# EAGLE board main_board (EAGLE 5.12)
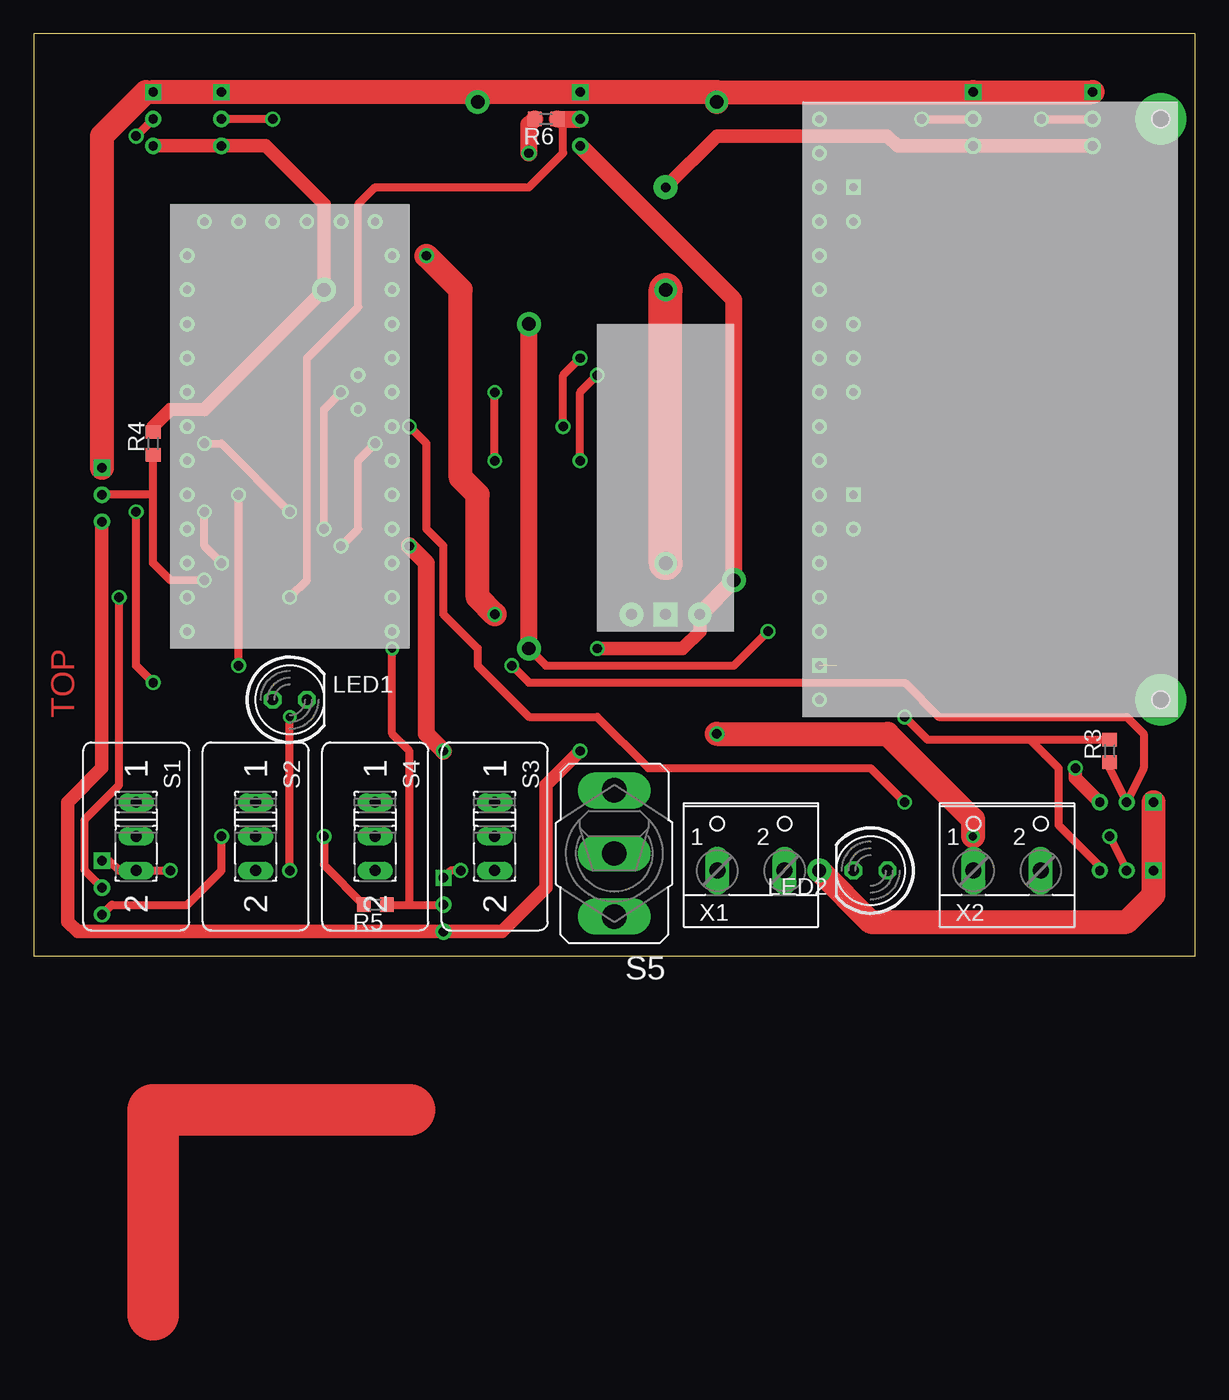
[diagram p0: board, top side]
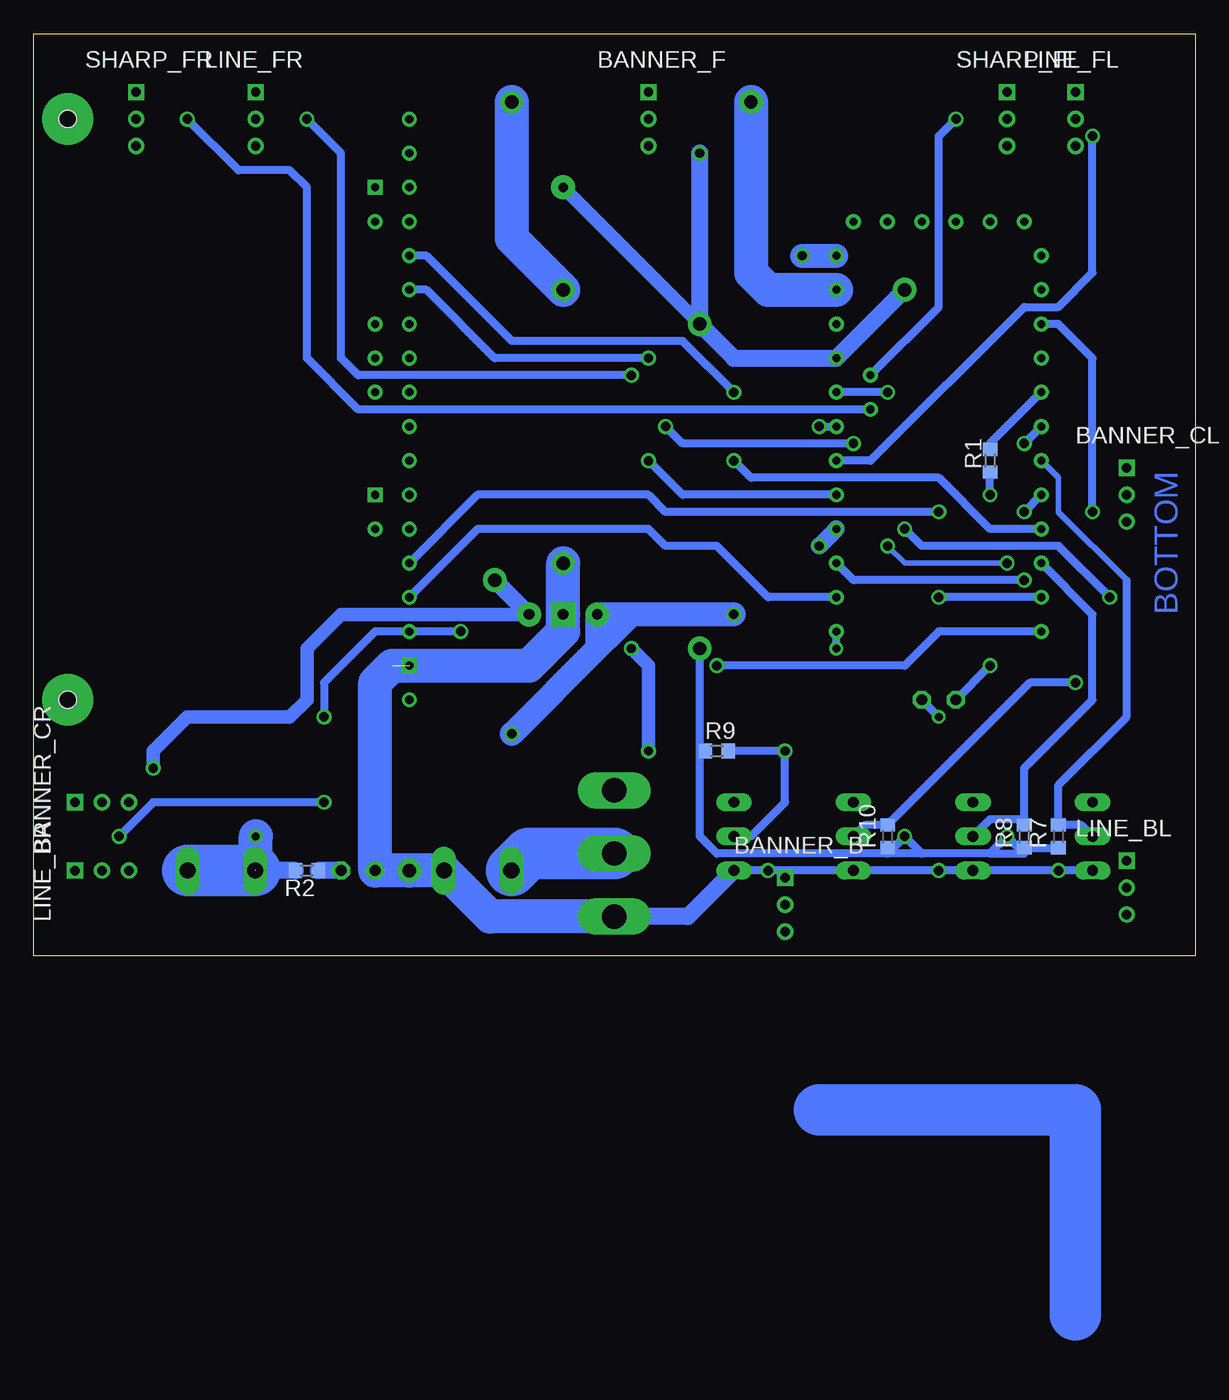
[diagram p1: board, bottom side, seen from below]

Size 86.36 x 68.58 mm. Coordinates in mm from the lower left corner, seen from the top.
Outline: 0,0 86.36,0 86.36,68.58 0,68.58 0,0
Copper layers (1*16): Top 0.035mm / dielectric 1.5mm / Bottom 0.035mm
Design rules "default *": minimum track width 10mil, minimum drill 20mil, track to track 8mil, track to pad 8mil, pad to pad 8mil, via to via 8mil, smd to smd 8mil, copper to edge 40mil, drill to drill 8mil, minimum pad ring 10mil, minimum via ring 8mil, stop-mask expansion 4mil, vias tented up to drill 0mil, thermal gap 10mil

## Footprints (pad centres in the part's own frame; a part is rotated, then mirrored left to right if it is on the bottom)
CON_JST = drill 0.7 square: 1 0,2 | drill 0.7 round: 2 0,0; 3 0,-2
LED5MM = drill 0.813 octagon: A -1.27,0; K 1.27,0
R0603 = smd 1 x 1.1: 1 -0.85,0; 2 0.85,0
M251 = drill 0.813 long: 1 -2.54,0; 2 0,0; 3 2.54,0
M9040P = drill 1.803 long: 1 0,4.699; 2 0,0; 3 0,-4.699
BOOST_ADJ = drill 0.8 pad 1.778 square: GND 5.08,1.27 | drill 0.8 pad 1.778 round: VIN 2.54,1.27; VOUT 7.62,1.27
DRIVER_DUAL_MC33926 = drill 0.6 round: /M1D2 1.27,13.97; /M1SF 1.27,19.05; /M2D2 1.27,36.83; /M2SF 1.27,41.91; EN 1.27,24.13; INV 1.27,29.21; M1D1 1.27,16.51; M1FB 1.27,21.59; M1IN1 1.27,11.43; M1IN2 1.27,8.89; M2D1 1.27,39.37; M2FB 1.27,44.45; M2IN1 1.27,34.29; M2IN2 1.27,31.75; P$20 3.81,36.83; P$21 3.81,29.21; P$22 3.81,26.67; P$23 3.81,24.13; P$25 3.81,13.97; SLEW 1.27,26.67; VDD 1.27,6.35; VIN 1.27,1.27 | drill 0.6 square: GND 1.27,3.81; P$2 3.81,39.37; P$3 3.81,16.51 | hole 1.3: 26.67,44.45; 26.67,1.27
ARDUINO_PRO_MINI = drill 0.6 round: DTR -5.08,5.08; GND -6.35,-5.08; GND' 5.08,5.08; GND'' 7.62,5.08; GND''' 8.89,0; PB0 -6.35,-22.86; PB1 -6.35,-25.4; PB2 8.89,-25.4; PB3 8.89,-22.86; PB4 8.89,-20.32; PB5 8.89,-17.78; PC0 8.89,-15.24; PC1 8.89,-12.7; PC2 8.89,-10.16; PC3 8.89,-7.62; PC4 6.35,-8.89; PC5 6.35,-6.35; PC6 -6.35,-2.54; PD0 -6.35,0; PD0' 0,5.08; PD1 -6.35,2.54; PD1' -2.54,5.08; PD2 -6.35,-7.62; PD3 -6.35,-10.16; PD4 -6.35,-12.7; PD5 -6.35,-15.24; PD6 -6.35,-17.78; PD7 -6.35,-20.32; RAW 8.89,2.54; RESET 8.89,-2.54; VCC 8.89,-5.08; VCC' 2.54,5.08
W237-102 = drill 1.194 long: 1 -2.5,-1.27; 2 2.5,-1.27

## Placement (x,y rotation side)
BANNER_B  CON_JST  [CON_JST]  30.48,3.81 0 bottom
BANNER_CL  CON_JST  [CON_JST]  5.08,34.29 0 bottom
BANNER_CR  CON_JST  [CON_JST]  81.28,11.43 90 bottom
BANNER_F  CON_JST  [CON_JST]  40.64,62.23 0 bottom
LED1  [LED5MM]  19.05,19.05 0 top
LED2  [LED5MM]  62.23,6.35 180 top
LINE_BL  CON_JST  [CON_JST]  5.08,5.08 0 bottom
LINE_BR  CON_JST  [CON_JST]  81.28,6.35 90 bottom
LINE_FL  CON_JST  [CON_JST]  8.89,62.23 0 bottom
LINE_FR  CON_JST  [CON_JST]  69.85,62.23 0 bottom
R1  1k  [R0603]  15.24,36.83 90 bottom
R2  1k  [R0603]  66.04,6.35 180 bottom
R3  10k  [R0603]  80.01,15.24 90 top
R4  10k  [R0603]  8.89,38.1 90 top
R5  10k  [R0603]  25.4,3.81 180 top
R6  10k  [R0603]  38.1,62.23 180 top
R7  10k  [R0603]  10.16,8.89 90 bottom
R8  10k  [R0603]  12.7,8.89 90 bottom
R9  10k  [R0603]  35.56,15.24 0 bottom
R10  10k  [R0603]  22.86,8.89 90 bottom
S1  [M251]  7.62,8.89 270 top
S2  [M251]  16.51,8.89 270 top
S3  [M251]  34.29,8.89 270 top
S4  [M251]  25.4,8.89 270 top
S5  [M9040P]  43.18,7.62 180 top
SHARP_FL  CON_JST  [CON_JST]  13.97,62.23 0 bottom
SHARP_FR  CON_JST  [CON_JST]  78.74,62.23 0 bottom
U$1  BOOST_ADJ  [BOOST_ADJ]  41.91,24.13 0 top
U$2  DRIVER_DUAL_MC33926  [DRIVER_DUAL_MC33926]  57.15,17.78 0 top
U$3  ARDUINO_PRO_MINI  [ARDUINO_PRO_MINI]  17.78,49.53 0 top
X1  [W237-102]  53.34,7.62 0 top
X2  [W237-102]  72.39,7.62 0 top

## Library data of the parts
BANNER_B BANNER_CL BANNER_CR BANNER_F LINE_BL LINE_BR LINE_FL LINE_FR SHARP_FL SHARP_FR U$1-U$3 = alte_piese
LED1 LED2 = led
R1-R6 = rcl
R7-R10 = resistor
S1-S5 = switch
X1 X2 = con-wago-500; MPN: 237-102; OC_FARNELL: unknown; OC_NEWARK: 70K9898

## Nets
+5V: LINE_BL.3 LINE_BR.3 LINE_FL.3 LINE_FR.3 R3.2 R4.2 R5.2 R6.2 R7.1 R8.1 R9.1 R10.1 SHARP_FL.3 SHARP_FR.3 U$2.VDD U$3.VCC
+8V: R2.2 U$1.VIN U$3.RAW X2.1 X2.2
+12V: BANNER_B.3 BANNER_CL.3 BANNER_CR.3 BANNER_F.3 U$1.VOUT
N$1: S5.2 X1.1
N$2: LED1.A R1.1
N$4: LED2.A R2.1
N$16: BANNER_B.1 BANNER_CL.1 BANNER_CR.1 BANNER_F.1 LED1.K LED2.K LINE_BL.1 LINE_BR.1 LINE_FL.1 LINE_FR.1 S1.3 S2.3 S3.3 S4.3 S5.1 SHARP_FL.1 SHARP_FR.1 U$1.GND U$2.GND U$3.GND''' X1.2
PB0: BANNER_F.2 R6.1 U$3.PB0
PB1: BANNER_CR.2 R3.1 U$3.PB1
PB2: BANNER_B.2 R5.1 U$3.PB2
PB3: U$2.M1IN2 U$3.PB3
PB4: BANNER_CL.2 R4.1 U$3.PB4
PB5: R9.2 S3.2 U$3.PB5
PC0: LINE_FR.2 U$3.PC0
PC1: LINE_FL.2 U$3.PC1
PC2: LINE_BR.2 U$3.PC2
PC3: LINE_BL.2 U$3.PC3
PC4: SHARP_FR.2 U$3.PC4
PC5: SHARP_FL.2 U$3.PC5
PC6: R10.2 S4.2 U$3.PC6
PD2: R1.2 U$3.PD2
PD3: U$2.M1IN1 U$3.PD3
PD4: R7.2 S1.2 U$3.PD4
PD5: U$2.M2IN2 U$3.PD5
PD6: U$2.M2IN1 U$3.PD6
PD7: R8.2 S2.2 U$3.PD7
VIN: U$2.VIN

## Tracks (layer width: path | path; a pad name or v marks a point on that pad's centre or on a via)
+5V  (via drill 0.7, 0.7 pad 1.78, 1 pad 1.78)
  Top 0.61: 8.89,39.37 R4.2 | 74.08,16.09 R3.2 | v64.77,17.78 66.46,16.09 74.08,16.09 | 74.08,16.09 76.2,13.97 76.2,9.74 79.28,6.66 LINE_BR.3 | v36.83,22.86 38.1,21.59 52.07,21.59 v54.61,24.13 | R5.2 21.59,6.77 v21.59,8.89 | v13.97,8.89 13.97,6.35 11.43,3.81 5.81,3.81 LINE_BL.3
  Top 1.016: SHARP_FR.3 LINE_FR.3 64.23,60.23 63.5,60.96 50.8,60.96 v46.99,57.15 | LINE_FL.3 SHARP_FL.3 17.24,60.23 21.59,55.88 v21.59,49.53 12.7,40.64 10.16,40.64 8.89,39.37
  Top 1.27: v36.83,22.86 v36.83,46.99 | v36.83,59.69 36.83,61.81 R6.2
  Bottom 0.61: v64.77,17.78 64.77,20.32 60.96,24.13 U$2.VDD v54.61,24.13 | 36.83,15.24 v36.83,22.86 | 36.83,15.24 R9.1 36.83,14.82 | 36.83,14.82 36.83,8.89 35.56,7.62 22.86,7.62 | 15.24,7.62 v13.97,8.89 13.12,8.04 R8.1 R7.1 | 15.24,7.62 20.32,7.62 | 20.32,7.62 v21.59,8.89 22.44,8.04 R10.1 22.86,7.62 | 20.32,7.62 22.86,7.62 | 15.24,7.62 12.7,7.62 | 36.83,14.82 36.83,15.24
  Bottom 1.016: v36.83,46.99 v46.99,57.15
  Bottom 1.27: v21.59,49.53 U$3.VCC 34.29,44.45 v36.83,46.99 v36.83,59.69
+8V  (via drill 0.6, 0.7)  (1 unrouted)
  Top 1.778: v50.8,16.51 63.5,16.51 69.85,10.16 v69.85,8.89 | v29.21,52.07 31.75,49.53 31.75,35.56 33.02,34.29 33.02,26.67 v34.29,25.4
  Bottom 1.27: R2.2 69.85,6.35 X2.1
  Bottom 1.778: v29.21,52.07 U$3.RAW | 41.91,25.4 43.18,24.13 | 43.18,24.13 44.45,22.86 | 44.45,22.86 v50.8,16.51 | v34.29,25.4 41.91,25.4 | 43.18,24.13 U$1.VIN | U$1.VIN 43.18,25.4 | 41.91,25.4 U$1.VIN | U$1.VIN 44.45,22.86
  Bottom 2.54: 69.85,6.35 v69.85,8.89
  Bottom 3.81: X2.1 X2.2
+12V  (via drill 0.7, 1 pad 1.78)
  Top 1.016: v40.64,15.24 38.1,12.7 38.1,5.08 34.83,1.81 BANNER_B.3 3.27,1.81 2.54,2.54 2.54,11.43 5.08,13.97 BANNER_CL.3 | BANNER_CR.3 77.47,13.24 v77.47,13.97 | U$1.VOUT 49.53,24.13 48.26,22.86 v41.91,22.86
  Top 1.27: BANNER_F.3 52.07,48.8 v52.07,27.94 U$1.VOUT
  Bottom 1.016: U$1.VOUT 63.5,25.4 66.04,22.86 66.04,19.05 67.31,17.78 74.93,17.78 77.47,15.24 v77.47,13.97 | v40.64,15.24 40.64,21.59 v41.91,22.86
  Bottom 1.27: U$1.VOUT v52.07,27.94
N$1
  Bottom 3.81: S5.2 49.57,7.62 X1.1
N$2  (via drill 0.7)
  Top 0.61: v15.24,21.59 v15.24,34.29
  Bottom 0.61: v15.24,34.29 R1.1 | LED1.A v15.24,21.59
N$3
  Bottom 3.81: 27.94,-11.43 8.89,-11.43 8.89,-26.67
N$4
  Bottom 1.27: LED2.A R2.1
N$5  (via drill 0.6 pad 6.45)
  other vias: -48.26,5.08
N$6  (via drill 0.6 pad 3.81)
  other vias: 83.82,19.05
N$7  (via drill 0.6 pad 3.81)
  other vias: 83.82,62.23
N$8  (via drill 0.6 pad 6.45)
  other vias: -48.26,67.31
N$9
  Top 3.81: 27.94,-11.43 8.89,-11.43 8.89,-26.67
N$10  (via drill 0.6 pad 6.45)
  other vias: 125.73,63.5
N$11  (via drill 0.6 pad 6.45)
  other vias: 129.54,3.81
N$16  (via drill 0.6, 0.7, 1 pad 1.68, 1 pad 1.78)  (1 unrouted)
  Top 0.406: 34.29,64.77 33.02,64.77 v33.02,63.5 32.48,64.23
  Top 0.61: v10.16,6.35 S1.3 6.35,6.35 5.62,7.08 LINE_BL.1 | BANNER_B.1 31.02,6.35 v31.75,6.35 | v19.05,6.35 v19.05,17.78
  Top 1.27: LINE_FL.1 8.35,64.23
  Top 1.778: v58.42,6.35 62.23,2.54 81.28,2.54 83.28,4.54 LINE_BR.1 BANNER_CR.1 | BANNER_CL.1 5.08,60.96 8.35,64.23 | LINE_FL.1 SHARP_FL.1 32.48,64.23 BANNER_F.1 50.8,64.23 | SHARP_FR.1 LINE_FR.1 50.8,64.23 | v50.8,63.5 50.8,64.23
  Top 2.54: v46.99,29.21 v46.99,49.53
  Bottom 0.61: S1.3 v10.16,6.35 S2.3 v19.05,6.35 S4.3 v31.75,6.35 S3.3 | v19.05,17.78 LED1.K
  Bottom 1.27: S5.1 37.72,2.92 S3.3
  Bottom 2.54: S5.1 52.41,2.92 X1.2 v58.42,6.35 LED2.K 60.96,20.32 59.69,21.59 49.53,21.59 46.99,24.13 U$1.GND v46.99,29.21 | U$3.GND''' 31.75,49.53 33.02,50.8 v33.02,63.5 | v46.99,49.53 50.8,53.34 v50.8,63.5
PB0  (via drill 0.7)
  Top 0.61: v19.05,26.67 20.32,27.94 20.32,44.45 24.13,48.26 24.13,55.88 25.4,57.15 36.83,57.15 39.37,59.69 39.37,61.81 R6.1 | BANNER_F.2 39.37,62.23
  Top 1.27: R6.1 BANNER_F.2
  Bottom 0.61: U$3.PB0 v19.05,26.67
PB1  (via drill 0.7)
  Top 0.61: R3.1 80.01,13.97 BANNER_CR.2 82.55,13.97 82.55,16.51 81.28,17.78 67.31,17.78 64.77,20.32 36.83,20.32 v35.56,21.59
  Bottom 0.61: v35.56,21.59 21.59,21.59 19.05,24.13 U$3.PB1
PB2  (via drill 0.6)
  Top 0.61: 27.94,3.81 27.94,15.24 26.67,16.51 v26.67,22.86 | R5.1 BANNER_B.2
  Bottom 0.61: v26.67,22.86 U$3.PB2
PB3
  Bottom 0.61: U$3.PB3 31.75,26.67 35.56,30.48 39.37,30.48 40.64,31.75 53.34,31.75 U$2.M1IN2
PB4  (via drill 0.7)
  Top 0.61: v12.7,27.94 10.16,27.94 8.89,29.21 8.89,34.29 | 8.89,34.29 R4.1 | 8.89,34.29 BANNER_CL.2
  Bottom 0.61: U$3.PB4 25.4,27.94 v12.7,27.94
PB5  (via drill 0.7)
  Top 1.27: v30.48,15.24 29.21,16.51 29.21,29.21 v27.94,30.48
  Bottom 0.61: R9.2 v30.48,15.24 30.48,11.43 33.02,8.89 S3.2
  Bottom 1.27: v27.94,30.48 U$3.PB5
PC0  (via drill 0.7)
  Top 0.61: v40.64,36.83 40.64,41.91 v41.91,43.18 | v66.04,62.23 LINE_FR.2
  Bottom 0.61: v41.91,43.18 62.23,43.18 63.5,44.45 63.5,59.69 v66.04,62.23 | U$3.PC0 38.1,34.29 v40.64,36.83
PC1  (via drill 0.7)
  Top 0.61: v7.62,60.96 LINE_FL.2
  Bottom 0.61: v7.62,60.96 7.62,50.8 10.16,48.26 12.7,48.26 24.13,36.83 U$3.PC1
PC2  (via drill 0.7)
  Top 0.61: v80.01,8.89 LINE_BR.2 | v27.94,39.37 29.21,38.1 29.21,31.75 30.48,30.48 30.48,25.4 33.02,22.86 33.02,21.59 36.83,17.78 41.91,17.78 45.72,13.97 62.23,13.97 v64.77,11.43
  Bottom 0.61: v64.77,11.43 77.47,11.43 v80.01,8.89 | v27.94,39.37 U$3.PC2
PC3  (via drill 0.7)
  Top 0.61: LINE_BL.2 3.81,6.35 3.81,10.16 6.35,12.7 v6.35,26.67 | v21.59,31.75 21.59,40.64 v22.86,41.91
  Bottom 0.61: v22.86,41.91 U$3.PC3 | v6.35,26.67 10.16,30.48 20.32,30.48 v21.59,31.75
PC4  (via drill 0.7)
  Top 0.61: v74.93,62.23 SHARP_FR.2
  Bottom 0.61: U$3.PC4 62.23,40.64 66.04,44.45 66.04,57.15 67.31,58.42 71.12,58.42 v74.93,62.23
PC5  (via drill 0.7)
  Top 0.61: v17.78,62.23 SHARP_FL.2
  Bottom 0.61: v17.78,62.23 19.05,60.96 19.05,48.26 U$3.PC5
PC6  (via drill 0.7)
  Top 0.61: v7.62,33.02 7.62,21.59 v8.89,20.32
  Bottom 0.61: S4.2 24.55,9.74 R10.2 12.28,20.32 v8.89,20.32 | U$3.PC6 10.16,46.99 7.62,44.45 v7.62,33.02
PD2
  Bottom 0.61: U$3.PD2 15.24,38.1 R1.2
PD3  (via drill 0.7)
  Top 0.61: v12.7,38.1 13.97,38.1 v19.05,33.02
  Bottom 0.61: v19.05,33.02 39.37,33.02 40.64,34.29 53.34,34.29 U$2.M1IN1 | U$3.PD3 v12.7,38.1
PD4
  Bottom 0.406: U$3.PD4 10.16,35.56 10.16,33.02 5.08,27.94
  Bottom 0.61: S1.2 8.47,9.74 R7.2 10.16,12.7 5.08,17.78 5.08,27.94
PD5  (via drill 0.7)
  Top 0.61: v13.97,29.21 12.7,30.48 v12.7,33.02 | v22.86,30.48 24.13,31.75 24.13,36.83 v25.4,38.1 | v39.37,39.37 39.37,43.18 v40.64,44.45
  Bottom 0.406: v22.86,30.48 21.59,29.21 v13.97,29.21
  Bottom 0.61: U$2.M2IN2 57.15,49.53 52.07,44.45 v40.64,44.45 | v12.7,33.02 U$3.PD5 | v25.4,38.1 38.1,38.1 v39.37,39.37
PD6  (via drill 0.7)
  Top 0.61: v34.29,36.83 v34.29,41.91
  Bottom 0.61: U$2.M2IN1 57.15,52.07 50.8,45.72 38.1,45.72 v34.29,41.91 | v34.29,36.83 33.02,35.56 19.05,35.56 15.24,31.75 U$3.PD6
PD7
  Bottom 0.61: U$3.PD7 7.62,25.4 7.62,19.05 12.7,13.97 R8.2 13.12,10.16 15.24,10.16 S2.2

## Text on the board
Top: TOP
Bottom: BOTTOM